# Altium PCB Motherboard.PcbDoc
Units mm, origin at the board's own origin, x right, y up, seen from the top; angles counter-clockwise.
Board outline 97.28 x 66.17 mm, 2 copper layers (Top Layer, Bottom Layer); 93 components, 50 nets, 275 pads, 91 vias.
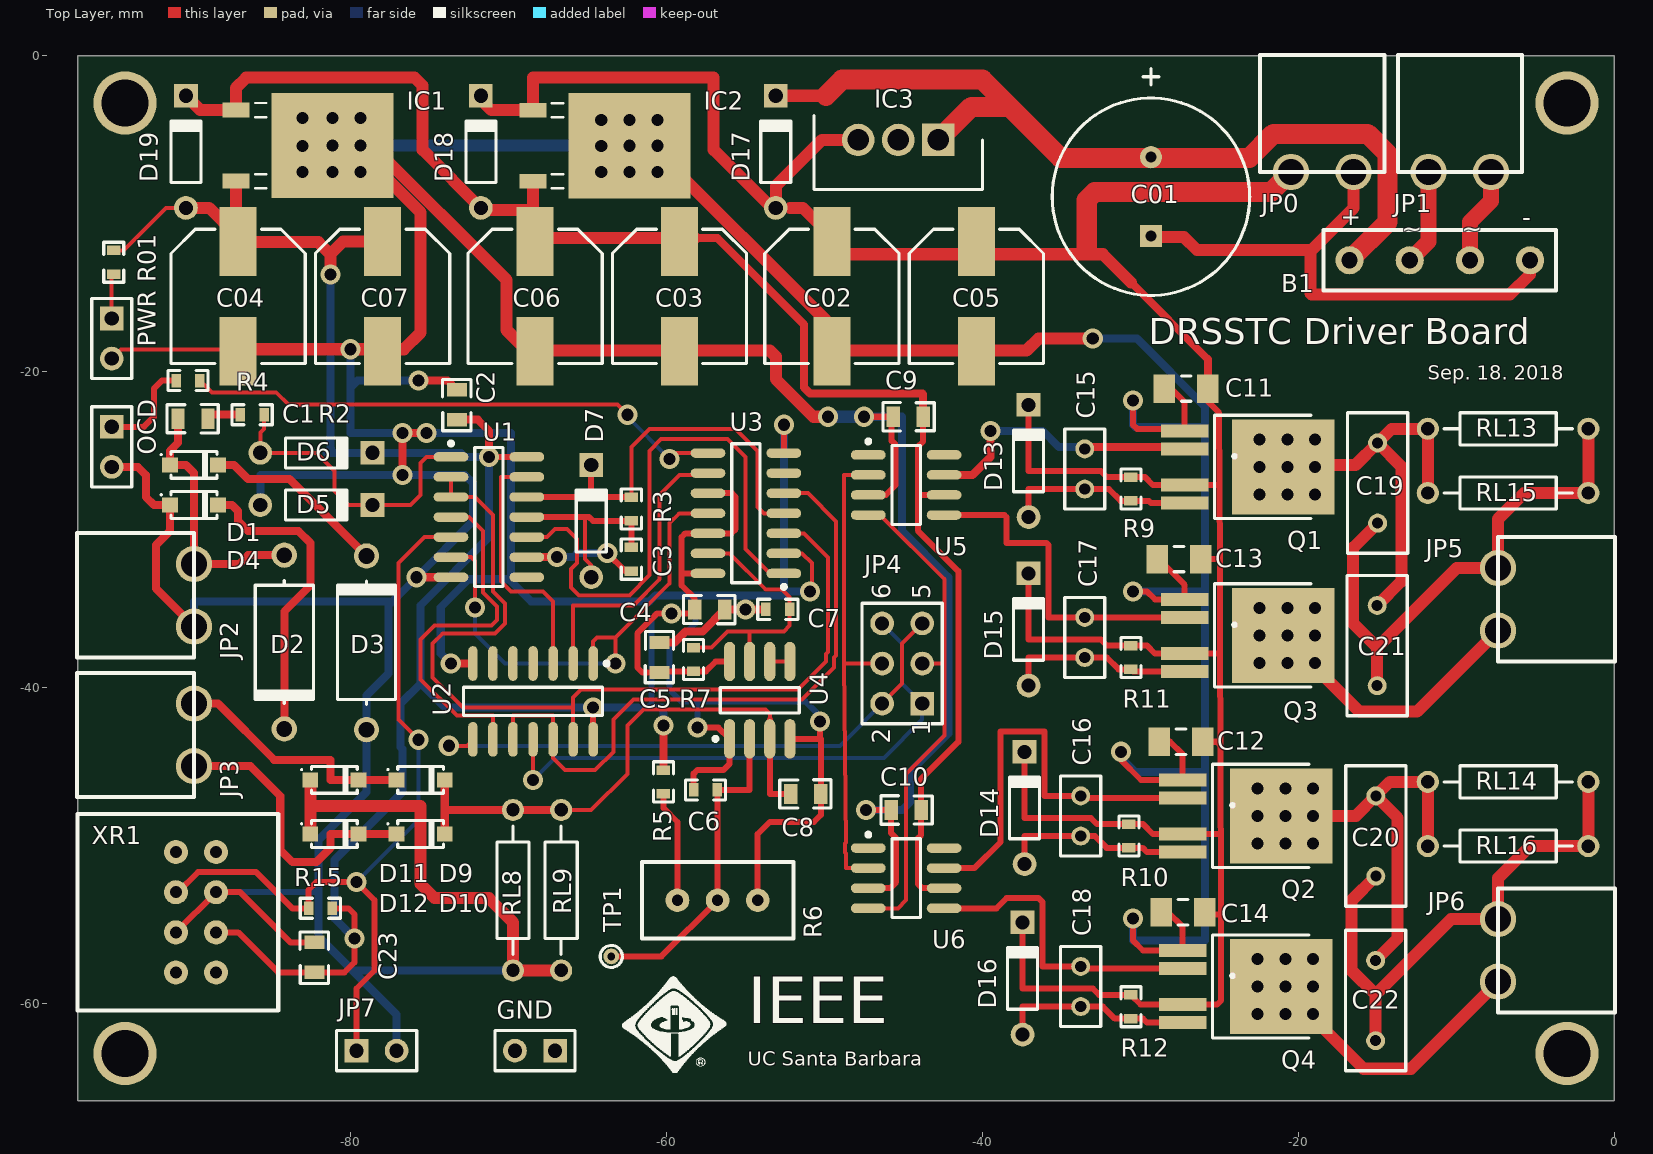
[diagram p0: Top Layer view]
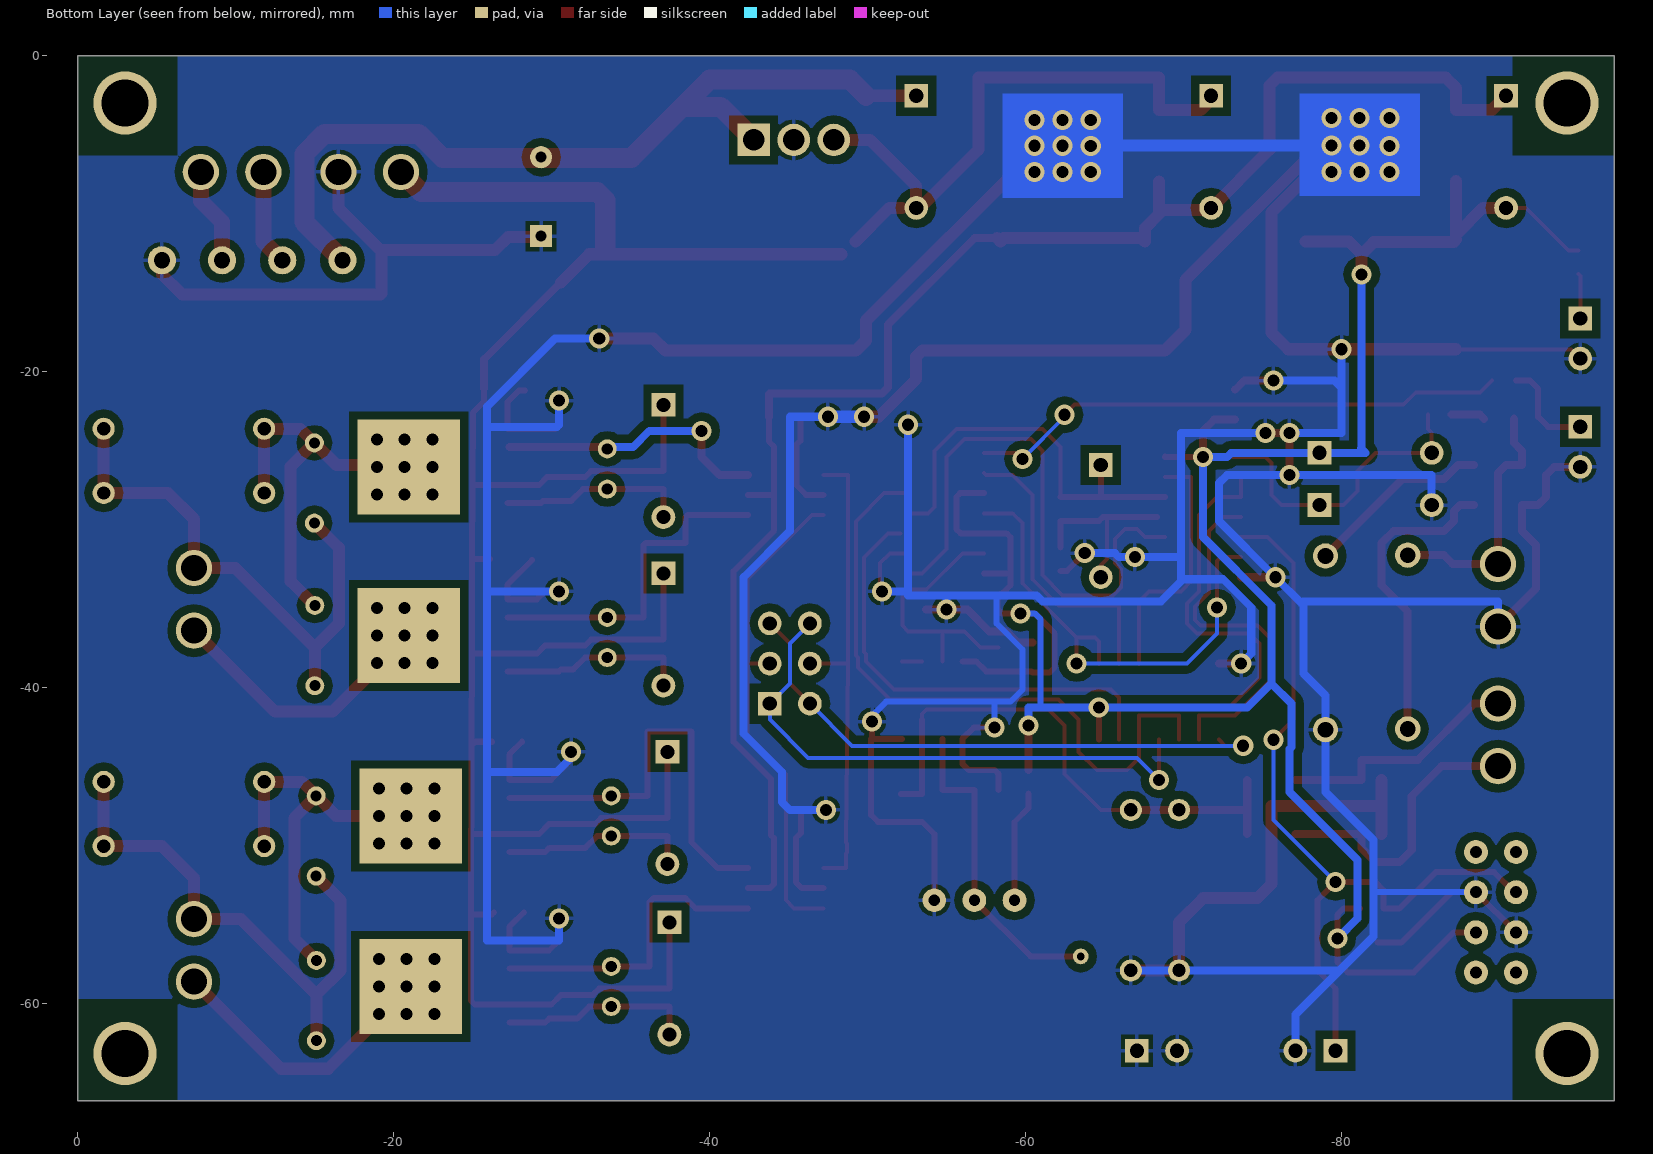
[diagram p1: Bottom Layer view, seen from below]

## Layer stack, top to bottom
Top Solder: solder mask 0.0102, Solder Resist, Dk 3.5
Top Layer: signal copper 0.0356
Dielectric 1: dielectric 0.32, FR-4, Dk 4.8
Bottom Layer: signal copper 0.0356
Bottom Solder: solder mask 0.0102, Solder Resist, Dk 3.5

## Board outline
-97.282,-66.167 -97.282,0 0,0 0,-66.167

## Design rules (kind name [scope] priority, off if disabled: settings)
Clearance "Bottom Plane" [(OnLayer('Bottom Layer') AND InNamedPolygon('Ground_Plane'))] p1: gap=0.508 ignorepadtopadclearanceinfootprint=FALSE except(0: Arc-Hole Track-Hole SMDPad-Hole THPad-Hole Via-Hole Fill-Hole Poly-Hole Region-Hole Text-Hole)
Clearance [All] p2: gap=0.254 ignorepadtopadclearanceinfootprint=FALSE except(0: Arc-Hole Track-Hole SMDPad-Hole THPad-Hole Via-Hole Fill-Hole Poly-Hole Region-Hole Text-Hole)
HoleSize [All] p1: absolutevalues=TRUE maxlimit=2.54 minlimit=0.4 maxpercent=80.000 minpercent=20.000
PolygonConnect [All] p1: connectstyle=Relief reliefconductorwidth=0.254 reliefentries=4 polygonreliefangle="90 Angle" airgapwidth=0.254
RoutingVias [All] p1: holewidth=0.711 width=1.27 viastyle="Through Hole" minholewidth=0.711 minwidth=1.27 maxholewidth=0.711 maxwidth=1.27
SolderMaskExpansion [All] p1: expansion=0.102
Width [All] p1: maxlimit=1.27 minlimit=0.254 preferedwidth=0.508
29 further rules are at their usual default settings.

## Classes and differential pairs
polygon class Planes: Ground_Plane
polygon class PlaneClass: Ground_Plane

## Components (designator, comment, footprint, x,y, rotation, side; value= is the part's Value field where it differs from the comment)
B1 "" KBP307 -11.049,-12.954 r0 top
C01 "12.5 x 25mm" CAP_12_5X25 -29.337,-6.43 r270 top value="1000uF 35V"
C1 "" D0805 -89.977,-22.987 r180 top value=0.1uF
C02 "330uF" CAPALUM8X10 -49.53,-15.24 r270 top
C2 "0805" D0805 -73.279,-22.098 r270 top value=0.1uf
C03 "" CAPALUM8X10 -59.182,-15.24 r270 top value=330uF
C3 "0603" D0603 -62.23,-31.877 r90 top value=22nF
C04 "" CAPALUM8X10 -87.122,-15.24 r270 top value=330uF
C4 "0805" D0805 -57.277,-35.067 r180 top value=0.1uf
C05 "8.3 x 10.2mm" CAPALUM8X10 -40.386,-15.24 r270 top value="330uF 25V"
C5 "0805" D0805 -60.452,-38.1 r90 top value=0.1uf
C06 "8.3x10.2mm" CAPALUM8X10 -68.326,-15.24 r270 top value="330uF 25V"
C6 "0603" D0603 -57.531,-46.482 r180 top value=0.1uf
C07 "8.3x10.2mm" CAPALUM8X10 -77.978,-15.24 r270 top value="330uF 25V"
C7 "0603" D0603 -52.959,-35.052 r0 top value=100pF
C8 "0805" D0805 -51.181,-46.736 r180 top value=100pF
C9 "0805" D0805 -44.704,-22.86 r0 top value=0.1uF
C10 "0805" D0805 -44.831,-47.752 r0 top value=0.1uF
C11 "0805" CAPC1206 -27.112,-21.082 r0 top value=10u
C12 "0805" CAPC1206 -27.432,-43.434 r0 top value=10u
C13 "0805" CAPC1206 -27.559,-31.877 r180 top value=10u
C14 "0805" CAPC1206 -27.305,-54.229 r180 top value=10u
C15 "Rad" RAD-0.1 -33.528,-26.166 r90 top value=.1u
C16 "Rad" RAD-0.1 -33.782,-48.133 r90 top value=.1u
C17 "Rad" RAD-0.1 -33.528,-36.834 r90 top value=.1u
C18 "Rad" RAD-0.1 -33.782,-58.928 r90 top value=.1u
C19 "Rad10" RAD-0.2 -14.986,-27.055 r90 top value=1u
C20 "Rad10" RAD-0.2 -15.1,-49.403 r90 top value=1u
C21 "Rad10" RAD-0.2 -15.013,-37.345 r90 top value=1u
C22 "Rad10" RAD-0.2 -15.113,-59.817 r90 top value=1u
C23 "0805" D0805 -82.296,-57.084 r270 top value=1u
D1 "1n5819" "SOD123 STD" -89.916,-25.908 r0 top
D2 "1N5337B" 1N533X -84.201,-31.623 r270 top
D3 "1N5337B" 1N533X -78.994,-42.672 r90 top
D4 "1n5819" "SOD123 STD" -89.916,-28.448 r0 top
D5 "1N4148" DO-35 -82.169,-28.448 r0 top
D6 "1N4148" DO-35 -82.169,-25.146 r0 top
D7 "1N4148" DO-35 -64.77,-29.464 r90 top
D9 "1n5819" "SOD123 STD" -75.565,-45.847 r0 top
D10 "1n5819" "SOD123 STD" -75.565,-49.276 r0 top
D11 "1n5819" "SOD123 STD" -81.026,-45.847 r0 top
D12 "1n5819" "SOD123 STD" -81.026,-49.276 r0 top
D13 "1N4148" DO-35 -37.084,-25.658 r90 top
D14 "1N4148" DO-35 -37.338,-47.625 r90 top
D15 "1N4148" DO-35 -37.084,-36.326 r90 top
D16 "1N4148" DO-35 -37.465,-58.42 r90 top
D17 "1N4148" DO-35 -53.086,-6.09 r90 top
D18 "1N4148" DO-35 -71.755,-6.09 r90 top
D19 "1N4148" DO-35 -90.424,-6.09 r90 top
GND "Interrupter" HDR1X2 -67.056,-62.992 r180 top
IC1 "7805T" DPAK -81.153,-5.695 r270 top
IC2 "7809T" DPAK -62.357,-5.705 r270 top
IC3 "7824T" TO254P470X1016X2040-3P -42.799,-5.334 r180 top
JP0 "20V AC" VH-2P-3.96 -18.49,-7.366 r180 top
JP1 "20V AC" VH-2P-3.96 -9.779,-7.366 r180 top
JP2 "Feedback" VH-2P-3.96 -89.916,-34.163 r270 top
JP3 "OCD CT" VH-2P-3.96 -89.916,-43.001 r270 top
JP4 "Header 3X2" HDR2X3 -43.815,-41.021 r90 top
JP5 "GDT1" VH-2P-3.96 -7.366,-34.417 r90 top
JP6 "GDT1" VH-2P-3.96 -7.366,-56.642 r90 top
JP7 "Interrupter" HDR1X2 -79.629,-62.992 r0 top
OCD "DIP" HDR1X2 -95.123,-23.495 r270 top
PWR "DIP" HDR1X2 -95.123,-16.637 r270 top
Q1 "FDD8424H_F085A" DUAL_DPAK_4L1 -19.205,-26.039 r270 top
Q2 "FDD8424H_F085A" DUAL_DPAK_4L1 -19.332,-48.133 r270 top
Q3 "FDD8424H_F085A" DUAL_DPAK_4L1 -19.205,-36.707 r270 top
Q4 "FDD8424H_F085A" DUAL_DPAK_4L1 -19.332,-58.928 r270 top
R01 "0603" D0603 -94.996,-13.081 r90 top value=1K
R2 "0603" D0603 -86.233,-22.733 r0 top value=1K
R3 "0603" D0603 -62.23,-28.702 r270 top value=20K
R4 "0603" D0603 -90.297,-20.574 r0 top value=1K
R5 "0603" D0603 -60.198,-45.974 r90 top value=1K
R6 "RPot" 3296W -56.769,-53.467 r180 top value=10k
R7 "0603" D0603 -58.293,-38.227 r90 top value=1K
R9 "0603" D0603 -30.607,-27.436 r90 top value=1K
R10 "0603" D0603 -30.734,-49.403 r90 top value=1K
R11 "0603" D0603 -30.607,-38.104 r90 top value=1K
R12 "0603" D0603 -30.607,-60.21 r90 top value=1K
R15 "0603" D0603 -81.915,-53.975 r0 top value=1K
RL8 "2512" AXIAL-0.4 -69.723,-52.832 r90 top value=20R
RL9 "2512" AXIAL-0.4 -66.675,-52.832 r90 top value=20R
RL13 "2512" AXIAL-0.4 -6.727,-23.622 r180 top value=20R
RL14 "2512" AXIAL-0.4 -6.731,-45.974 r180 top value=1K
RL15 "2512" AXIAL-0.4 -6.731,-27.686 r180 top value=20R
RL16 "2512" AXIAL-0.4 -6.731,-50.038 r180 top value=20R
TP1 "TP" TP0_8 -63.5,-57.023 r0 top
U1 "SN74HC14D" D014_N -71.247,-29.21 r0 top
U2 "SN74HC08D" D014_N -68.453,-40.881 r270 top
U3 "SN74HC74D" D014_N -54.978,-28.971 r180 top
U4 "LM311D" D008_M -54.102,-40.804 r90 top
U5 "TC4423AVOA" SOIC-OA8_N -44.831,-27.178 r0 top
U6 "TC4423AVOA" SOIC-OA8_N -44.831,-52.07 r0 top
XR1 "2412 Optic Receiver" OPF2412T -95.504,-74.803 r180 top

## Footprints (in the part's own frame and the unit in brackets; to place one, negate y for a bottom-side part, rotate by r counter-clockwise, add the part's x,y. Pads: shape width x height; smd on the part's side, far side on the other; paste and mask are expansions set on the pad)
1N533X [mm]
  round 1.6 hole 1: A(0,0) K(11,0)
  silkscreen extent 1.6,-1.84 9.4,1.84
3296W [mm] "3296W Trimpot"
  round 1.5 hole 0.7: 1(-2.54,0) 2(0,0) 3(2.54,0)
  silkscreen extent -4.8,-2.41 4.8,2.42, body extent -4.7,-2.29 4.7,2.29, height 10.03
AXIAL-0.4 [mm] "Axial Device, Thru-Hole; 2 Leads; 0.4 in Pin Spacing"
  round 1.4 hole 0.85: 1(-5.08,0) 2(5.08,0)
  silkscreen extent -4.06,-1.02 4.06,1.02
CAP_12_5X25 [mm]
  round 1.4 hole 0.7: 1(0,0)
  rect 1.4x1.4 hole 0.7: 2(5,0)
  silkscreen extent -5.6,-6.25 8.75,6.25
CAPALUM8X10 [mm] "Aluminum Electrolytic Capacitor, Body 8.30x8.30x10.30mm, IPC Low Density"
  rect 4.35x2.35 smd: 1(-3.475,0) 2(3.475,0)
  silkscreen extent -4.25,-4.25 4.25,4.25, body extent -4.45,-4.25 4.45,4.25, height 10.3
CAPC1206 [mm] "Chip Capacitor, 2-Leads, Body 3.20x1.60mm, IPC Medium Density"
  rect 1.35x1.8 smd: 1(-1.375,0) 2(1.375,0)
  silkscreen extent -0.3,-0.8 0.3,0.8, body extent -1.7,-0.9 1.7,0.9, height 1.8
D008_M [mm] "SOIC, 8-Leads, Body 4.9x3.9mm, Pitch 1.27mm, IPC Low Density"
  oval 2.5x0.7 smd: 1(-2.45,1.905) 2(-2.45,0.635) 3(-2.45,-0.635) 4(-2.45,-1.905) 5(2.45,-1.905) 6(2.45,-0.635) 7(2.45,0.635) 8(2.45,1.905)
  silkscreen extent -2.57,-2.5 0.8,2.93, body extent -2,-2.5 2,2.5, height 1.75
D014_N [mm] "SOIC, 14-Leads, Body 8.7x3.9mm, Pitch 1.27mm, IPC Medium Density"
  oval 2.2x0.6 smd: 1(-2.4,3.81) 2(-2.4,2.54) 3(-2.4,1.27) 4(-2.4,0) 5(-2.4,-1.27) 6(-2.4,-2.54) 7(-2.4,-3.81) 8(2.4,-3.81) 9(2.4,-2.54) 10(2.4,-1.27) 11(2.4,0) 12(2.4,1.27) 13(2.4,2.54) 14(2.4,3.81)
  silkscreen extent -2.52,-4.4 0.9,4.78, body extent -1.95,-4.33 1.95,4.33, height 1.75
D0603 [mm] "D0603"
  rect 0.6x0.85 smd: 1(-0.75,0) 2(0.75,0)
  silkscreen extent -1.27,-0.64 1.27,0.64, body extent -0.8,-0.4 0.8,0.4, height 0.5
D0805 [mm] "D0805"
  rect 0.85x1.27 smd: 1(-0.95,0) 2(0.95,0)
  silkscreen extent -1.6,-0.9 1.65,0.9, body extent -1,-0.64 1,0.64, height 1.25
DO-35 [mm] "Diode, Axial; Body 3.8 x 1.9 mm (LxDia. max), Lead Dia. 0.53 mm (max)"
  round 1.5 hole 0.9: 1(-3.55,0)
  rect 1.5x1.5 hole 0.9: 2(3.55,0)
  silkscreen extent -1.95,-0.95 2.05,0.95
DPAK [mil]
  rect 37x67 smd paste+0 mask+0: 1(-88.58,-240.5) 3(88.58,-240.5)
  rect 262x304 smd paste+0 mask+0: 2(0,0)
  silkscreen extent -106,-193 106,-165, body extent 0,0 10,10, height 10
DUAL_DPAK_4L1 [mm]
  rect 0.8x3 smd: 1(-2.28,-8) 2(-1.14,-8) 4(1.14,-8) 5(2.28,-8)
  rect 6x6.5 smd: 6(0,-1.75)
  rect 6x6.5 smd far side: 6(0,-1.75)
  silkscreen extent -3.27,-6.1 3.27,0
HDR1X2 [mm] "Connector; Header; 2 Position"
  rect 1.5x1.5 hole 0.9: 1(0,0)
  round 1.5 hole 0.9: 2(2.54,0)
  silkscreen extent -1.27,-1.27 3.81,1.27
HDR2X3 [mm] "Connector; Header; 3x2 Position"
  rect 1.5x1.5 hole 0.9: 1(0,0)
  round 1.5 hole 0.9: 2(0,2.54) 3(2.54,0) 4(2.54,2.54) 5(5.08,0) 6(5.08,2.54)
  silkscreen extent -1.27,-1.27 6.35,3.81
KBP307 [mil] "KBP307 Bridge, compatible with standard library"
  round 70 hole 40: 1(-225,0) 2(-75,0) 3(225,0) 4(75,0)
  silkscreen extent -290,-75 290,75
OPF2412T [mil] "Optic Receiver"
  round 60 hole 30: 1(-275,-660) 2(-275,-760) 3(-275,-860) 4(-275,-960) 5(-175,-960) 6(-175,-860) 7(-175,-760) 8(-175,-660)
  silkscreen extent -430,-1055 70,-565
RAD-0.1 [mm] "Radial Cap, Thru-Hole; 2 Leads; 0.1 in Pin Spacing"
  round 1.2 hole 0.7: 1(-1.27,0) 2(1.27,0)
  silkscreen extent -2.54,-1.27 2.54,1.27
RAD-0.2 [mm] "Radial Cap, Thru-Hole; 2 Leads; 0.2 in Pin Spacing"
  round 1.2 hole 0.7: 1(-2.54,0) 2(2.54,0)
  silkscreen extent -4.44,-1.91 4.44,1.91
"SOD123 STD" [mm] "SODFL, 2-Leads, Body 1.55x3.70mm, IPC Medium Density"
  rect 1x0.95 smd: A(-1.524,0) C(1.524,0)
  silkscreen extent -2.12,-0.85 1.45,0.85, body extent -1.43,-0.85 1.42,0.85, height 1.35
SOIC-OA8_N [mm] "SOIC, 8-Leads, Body 4.9x3.9mm, Pitch 1.27mm, IPC Medium Density"
  oval 2.2x0.6 smd: 1(-2.4,1.905) 2(-2.4,0.635) 3(-2.4,-0.635) 4(-2.4,-1.905) 5(2.4,-1.905) 6(2.4,-0.635) 7(2.4,0.635) 8(2.4,1.905)
  silkscreen extent -2.52,-2.5 0.9,2.88, body extent -2,-2.5 2,2.5, height 1.75
TO254P470X1016X2040-3P [mm]
  rect 2.055x2.055 / inner round 2.055 / far side rect 2.055x2.055 hole 1.37: 1(0,0)
  round 2.055 hole 1.37: 2(2.535,0) 3(5.07,0)
  silkscreen extent -2.8,-1.55 7.87,3.15
TP0_8 [mm] "Test Point"
  round 1 hole 0.5 mask+0.05: 1(0,0)
  silkscreen extent -0.7,-0.7 0.7,0.7
VH-2P-3.96 [mm]
  round 2.3 hole 1.65: 1(-1.98,0) 2(1.98,0)
  silkscreen extent -3.93,-7.4 3.93,0

## Part data
B1: library part Bridge1, "Full Wave Diode Bridge", DatasheetVersion=E2732B, LatestRevisionDate=29-May-2009, LatestRevisionNote="Sch pins A & K swapped.", PackageDescription="Bridge Rectifier; 4 Terminals; Body 9.4 x 9.4 mm (typ); Pitch 5.08 mm", PackageReference=D-38, Published=8-Jun-2000, Publisher="Altium Limited"
C01 C02 C03 C04 C05 C06 C07: library part "Cap Pol1", "Polarized Capacitor (Radial)", LatestRevisionDate=17-Jul-2002, LatestRevisionNote="Re-released for DXP Platform.", PackageDescription="Polarized Capacitor (Radial); 2 Leads", PackageReference=RB7.6-15, Published=8-Jun-2000, Publisher="Altium Limited"
C1 C2 C3 C4 C5 C6 C7 C8 C9 C10 C11 C12 C13 C14 C15 C16 C17 C18 C19 C20 C21 C22 C23: library part Cap, "Capacitor", LatestRevisionDate=17-Jul-2002, LatestRevisionNote="Re-released for DXP Platform.", PackageDescription="Radial Cap, Thru-Hole; 2 Leads; 0.3 in Pin Spacing", Published=8-Jun-2000, Publisher="Altium Limited"
  C1: PackageReference="0805 NP0"
  C2 C3 C4 C5 C6 C7 C8 C9 C10 C11 C12 C13 C14 C15 C16 C17 C18 C19 C20 C21 C22 C23: PackageReference=RAD-0.3
D1 D4 D9 D10 D11 D12: library part Component_1, "1N5819 Diode"
D2 D3: library part "D Zener", "Zener Diode", LatestRevisionDate=17-Jul-2002, LatestRevisionNote="Re-released for DXP Platform.", PackageDescription="Diode, Thru-Hole; 2 Leads; 0.7 in Pin Spacing", PackageReference=DIODE-0.7, Published=8-Jun-2000, Publisher="Altium Limited"
D5 D6 D7: library part Diode, "Default Diode", Code_JEDEC=DO-214-AB, LatestRevisionDate=17-Jul-2002, LatestRevisionNote="Re-released for DXP Platform.", PackageDescription="DO-214-AB/SMC; 2 C-Bend Leads; Body 7.9 x 5.9 mm, inc. leads (LxW)", PackageReference=SMC, PackageVersion=Sep-1996, Published=8-Jun-2000, Publisher="Altium Limited"
D13 D14 D15 D16 D17 D18 D19: "High Conductance Fast Diode", Code_JEDEC=DO-204-AH, ComponentLink1Description="Manufacturer Link", ComponentLink1URL=http://www.fairchildsemi.com/, ComponentLink2Description=Datasheet, ComponentLink2URL=http://www.fairchildsemi.com/ds/1N%2F1N4148.pdf, DatasheetDocument=1997, LatestRevisionDate=17-Jul-2002, LatestRevisionNote="Re-released for DXP Platform.", PackageReference=DO-35, Published=8-Jun-2000, Publisher="Altium Limited"
GND JP0 JP1 JP2 JP3 JP5 JP6 JP7: library part "Header 2", "Header, 2-Pin", LatestRevisionDate=17-Jul-2002, LatestRevisionNote="Re-released for DXP Platform.", Publisher="Altium Limited"
IC1 IC2 IC3: library part "Volt Reg", "Voltage Regulator", LatestRevisionDate=29-May-2009, LatestRevisionNote="IPC-7351 Footprint Added.", PackageDescription="3-Pin Transistor Outline Package 2.54 mm Pitch, 15.1 mm Lead Span", PackageReference=D2PAK, Published=24-Mar-1999, Publisher="Altium Limited"
JP4: "Header, 3-Pin, Dual row", LatestRevisionDate=17-Jul-2002, LatestRevisionNote="Re-released for DXP Platform.", Publisher="Altium Limited"
OCD PWR: library part LED3, "Typical BLUE SiC LED", DatasheetVersion=16-Apr-2002, LatestRevisionDate=17-Dec-2003, LatestRevisionNote="PCB Footprint replaced.", PackageDescription="SM LED; 2 C-Bend Leads; Body 3.5 x 2.8 x 1.9 mm, inc leads (LxWxH typ)", PackageReference=3.5X2.8X1.9, PackageVersion=16-Apr-2002, Published=8-Jun-2000, Publisher="Altium Limited"
Q1 Q2 Q3 Q4: "MOSFET Dual N&PCH PwrTrench +/- 40V,20A", Manufacturer_Name="Fairchild Semiconductor", RS Part Number=8648102P, Datasheet Link=http://www.mouser.com/ds/2/308/FDD8424H_F085A-1122839.pdf, Manufacturer_Part_Number=FDD8424H_F085A, RS Price/Stock=http://uk.rs-online.com/web/p/products/8648102P
R01 R2 R3 R4 R5 R7 R9 R10 R11 R12 R15 RL8 RL9 RL13 RL14 RL15 RL16: library part Res1, "Resistor", LatestRevisionDate=17-Jul-2002, LatestRevisionNote="Re-released for DXP Platform.", PackageDescription="Axial Device, Thru-Hole; 2 Leads; 0.3 in Pin Spacing", PackageReference=AXIAL-0.3, Published=8-Jun-2000, Publisher="Altium Limited"
R6: "Trimpot"
U1: "Hex Schmitt-Trigger Inverter", Code_IPC=SOIC127P600-14, ComponentLink1Description="Manufacturer Link", ComponentLink1URL=http://www.ti.com/, ComponentLink2Description=Datasheet, ComponentLink2URL=http://www-s.ti.com/sc/ds/sn74hc14.pdf, DatasheetVersion=May-1997, LatestRevisionDate=13-Apr-2006, LatestRevisionNote="IPC-7351 Footprint Added.", PackageDescription="14-Pin Small Outline Integrated Circuit 1.27 mm Pitch", PackageReference=D014, PackageVersion=Jan-1998, Published=8-Jun-2000, Publisher="Altium Limited"
U2: "Quadruple 2-Input Positive-AND Gate", Code_IPC=SOIC127P600-14, ComponentLink1Description="Manufacturer Link", ComponentLink1URL=http://www.ti.com/, ComponentLink2Description=Datasheet, ComponentLink2URL=http://www-s.ti.com/sc/ds/SN74HC08.pdf, DatasheetVersion=May-1997, LatestRevisionDate=13-Apr-2006, LatestRevisionNote="IPC-7351 Footprint Added.", PackageDescription="14-Pin Small Outline Integrated Circuit 1.27 mm Pitch", PackageReference=D014, PackageVersion=Jan-1998, Published=8-Jun-2000, Publisher="Altium Limited"
U3: "Dual D-Type Positive-Edge-Triggered Flip-Flop with Clear and Preset", Code_IPC=SOIC127P600-14, ComponentLink1Description="Manufacturer Link", ComponentLink1URL=http://www.ti.com/, ComponentLink2Description=Datasheet, ComponentLink2URL=http://www-s.ti.com/sc/ds/sn74hc74.pdf, DatasheetVersion=May-1997, LatestRevisionDate=13-Apr-2006, LatestRevisionNote="IPC-7351 Footprint Added.", PackageDescription="14-Pin Small Outline Integrated Circuit 1.27 mm Pitch", PackageReference=D014, PackageVersion=Jan-1998, Published=8-Jun-2000, Publisher="Altium Limited"
U4: library part LM111JG, "Differential Comparator with Strobe", ComponentLink1Description="Manufacturer Link", ComponentLink1URL=http://www.ti.com/, ComponentLink2Description=Datasheet, ComponentLink2URL=http://www-s.ti.com/sc/ds/lm111.pdf, DatasheetVersion=Feb-1992, LatestRevisionDate=04-Mar-2005, LatestRevisionNote="Stylized 3D Model Added.", PackageDescription="DIP; 8 Leads; Row Spacing 7.62 mm; Pitch 2.54 mm", PackageReference=JG008, PackageVersion=Jan-1995, Published=16-Jan-2001, Publisher="Altium Limited"
U5 U6: "3A Dual High-Speed Power MOSFET Drivers, Inverting, Extended Temperature", Supplier Part Number 1=TC4423AVOA-ND, Code_IPC=SOIC127P600-8, ComponentLink1Description=Datasheet, ComponentLink1URL=http://ww1.microchip.com/downloads/en/DeviceDoc/21998b.pdf, ComponentLink2Description="Packaging Specification", ComponentLink2URL=http://www.microchip.com/stellent/groups/techpub_sg/documents/packagingspec/en012702.pdf, ComponentLink3Description="Microchip.com Home", ComponentLink3URL=http://www.microchip.com/, DatasheetVersion="revB, Apr-2007", LatestRevisionDate=01-Mar-2010, LatestRevisionNote="Sch Layout changed.", PackageDescription="8-Lead Plastic Small Outline (OA) - Narrow, 3.90mm Body [SOIC]", PackageReference=SOIC-OA8, PackageVersion="revBB, Aug-2009", Published=29-Jan-2009, Publisher="Altium Limited", Supplier 1=Digi-Key
XR1: library part OPF2412T, "Optic Receiver"

## Free pads (board coordinates)
  round 4 hole 3: 0(-94.282,-63.167) 0(-94.282,-3) 0(-3,-63.167) 0(-3,-3)

## Via types
v1: diameter 1.27, hole 0.762, Top Layer to Bottom Layer, 91 vias

## Nets (pads, with @x,y where several pads share a name; then routed paths per layer and width w, separated by ;. In a path a pad name is that pad's centre, name@x,y a point inside that pad or via, vN(x,y) a via of type N, cw(c..) or ccw(c..) an arc to the next point about the centre after c; other vN are vias at no path point)
5V: C2.2 C04.1 C4.2 C5.1 C07.1 C23.2 D6.2 D19.1 IC1.3 R01.2 R5.2 R7.1 R15.2 U1.14 U2.14 U3.10 U3.12 U3.14 U4.8 XR1.2 | length 159
  Top Layer w0.254: R01.2 -94.373,-12.331 -91.694,-9.652 D19.1@-90.069,-9.652
  Top Layer w0.381: XR1.2 -87.122,-55.499 -84.587,-58.034 C23.2 -80.386,-58.034 -79.756,-57.404 v1(-79.756,-55.88) -79.756,-54.356 -80.137,-53.975 R15.2 ; v1(-71.247,-25.4) U1.14 U1.14@-68.834,-25.387 ; U2.14@-64.643,-43.307 U2.14 v1(-64.643,-41.275) ; U3.14 -59.04,-32.781 -59.055,-32.766 ; U3.10 -55.865,-27.701 -55.626,-27.94 -55.626,-29.972 -55.895,-30.241 U3.12 -58.816,-30.241 -59.055,-30.48 -59.055,-32.766 ; U4.8 -56.896,-38.354 -57.519,-38.977 R7.1 -60.379,-38.977 C5.1 -61.534,-39.05 -61.849,-38.735 -61.849,-36.576 -60.579,-35.306 v1(-59.69,-35.306) -58.496,-35.306 -58.242,-35.052 C4.2 -58.227,-34.356 -59.055,-33.528 -59.055,-32.766
  Top Layer w0.508: C04.1@-87.262,-11.625 C04.1@-87.262,-11.335 ; C2.2 -71.948,-23.048 -71.247,-23.749 v1(-71.247,-25.4) ; R5.2 v1(-60.198,-42.418)
  Top Layer w0.762: D19.1 -88.957,-9.64 -87.262,-11.335 IC1.3 ; C04.1@-87.262,-11.625 C04.1 ; C04.1@-87.122,-11.811 -82.042,-11.811 -81.28,-12.573 ; v1(-81.28,-13.843) -81.28,-12.573 ; C07.1@-77.724,-11.781 -80.488,-11.781 -81.28,-12.573
  Bottom Layer w0.381: -60.833,-41.275 -60.96,-41.148 -60.96,-35.687 -60.579,-35.306 v1(-59.69,-35.306)
  Bottom Layer w0.508: v1(-81.28,-13.843) -81.28,-24.832 -81.25,-24.862 -81.534,-25.146 D6.2 -73.025,-25.146 -72.771,-25.4 v1(-71.247,-25.4) -71.247,-30.48 -75.565,-34.798 -75.565,-39.751 ; v1(-79.756,-55.88) -81.026,-54.61 -81.026,-50.927 -76.708,-46.609 -76.708,-43.907 -76.835,-43.78 -76.835,-41.021 -75.565,-39.751 ; v1(-60.198,-42.418) -60.198,-41.275 -60.833,-41.275 v1(-64.643,-41.275) -74.041,-41.275 -75.565,-39.751
9V: C03.1 C06.1 C9.2 C10.2 D18.1 D19.2 IC1.1 IC2.3 U5.6 U6.6 | length 101
  Top Layer w0.381: C9.2 -43.754,-24.426 -44.096,-24.768 -44.096,-27.813 ; U6.6 -43.815,-52.705 -44.069,-52.451 -44.069,-49.53 -43.881,-49.342 C10.2 -43.881,-45.786 -41.529,-43.434 -41.529,-32.639 -44.096,-30.072 -44.096,-27.813 ; U5.6 -44.096,-27.813
  Top Layer w0.508: C03.1@-58.212,-11.557 -56.769,-11.557 -51.308,-17.018 -51.308,-21.005 -50.915,-21.398 -43.797,-21.398 -43.754,-21.441 C9.2
  Top Layer w0.762: D19.2 -89.519,-3.445 IC1.1 -87.262,-2.045 -86.614,-1.397 -75.946,-1.397 -75.438,-1.905 -75.438,-5.969 -71.628,-9.779 -68.469,-9.779 -68.469,-7.958 IC2.3 ; C06.1@-68.469,-10.017 -67.564,-10.922 -67.564,-11.765 -67.356,-11.557 -58.628,-11.557 -58.42,-11.765 C03.1@-58.212,-11.557
24V: C02.1 C05.1 C11.2 C12.2 C13.1 C14.1 D13.2 D14.2 D15.2 D16.2 D17.1 D18.2 IC2.1 IC3.3 JP0.2 Q1.4 Q2.4 Q3.4 Q4.4 R9.2 R10.2 R11.2 R12.2 | length 193.8
  Top Layer w0.381: D16.2 -37.465,-59.055 -33.02,-59.055 -32.615,-59.46 R12.2 -29.999,-60.068 Q4.4 -25.143,-60.068 -24.892,-59.817 -24.892,-54.356 ; D14.2 -37.338,-48.26 -33.147,-48.26 -32.754,-48.653 R10.2 -29.833,-48.653 -29.213,-49.273 Q2.4 -27.329,-49.276 -25.019,-49.276 ; D15.2 -37.084,-36.961 -32.512,-36.961 -32.119,-37.354 R11.2 -29.579,-37.354 -29.087,-37.846 -24.956,-37.846 ; D13.2 -37.084,-26.293 -32.512,-26.293 -32.119,-26.686 R9.2 -29.706,-26.686 -29.213,-27.179 Q1.4 ; Q1.4@-27.205,-27.175 -25.019,-27.175 ; C14.1@-26.355,-54.229 -26.228,-54.356 -24.892,-54.356 ; C12.2@-26.228,-43.434 C12.2 -25.146,-43.434 -25.019,-43.561 ; C13.1@-26.101,-31.877 -25.019,-31.877 ; C11.2 -25.737,-21.888 -25.016,-22.609 -24.98,-31.874 -24.956,-37.846 ; -24.956,-37.846 -24.935,-43.431 -24.892,-54.356
  Top Layer w0.508: D17.1@-52.82,-9.64 -52.175,-9.64 ; C02.1@-49.254,-11.765 C02.1@-49.149,-11.765 ; -30.607,-14.351 -25.737,-19.221 C11.2
  Top Layer w0.762: D18.2@-71.628,-2.917 -71.09,-3.455 IC2.1 -68.466,-1.397 -57.023,-1.397 -57.023,-5.959 -53.342,-9.64 D17.1 -53.086,-8.255 -50.165,-5.334 IC3.3 ; -52.175,-9.64 -51.379,-9.64 C02.1@-49.254,-11.765 ; C02.1@-48.361,-12.553 -48.341,-12.573 -32.385,-12.573 -30.607,-14.351
  Top Layer w1.27: -33.401,-12.319 -33.401,-9.144 -32.893,-8.636 -21.74,-8.636 JP0.2
GND: B1.3 C01.2 C2.1 C02.2 C3.1 C03.2 C4.1 C04.2 C5.2 C05.2 C06.2 C6.2 C7.1 C07.2 C8.1 C9.1 C10.1 C11.1 C12.1 C13.2 C14.2 C23.1 D3.A D4.A D5.1 D11.A D12.A GND.1 GND.2 IC1.2 IC2.2 IC3.2 JP0.1 JP2.2 JP7.2 OCD.2 PWR.2 Q1.1 Q2.1 Q3.1 Q4.1 R6.1 RL8.1 RL9.1 U1.7 U1.9 U2.7 U3.2 U3.7 U4.1 U4.4 U5.3 U6.3 XR1.3 XR1.7 | length 602.3
  Top Layer w0.254: PWR.2 -94.534,-18.588 C04.2@-87.249,-18.588 ; U3.2 -51.42,-31.511 -50.8,-32.131 -50.8,-33.782 v1(-50.927,-33.909)
  Top Layer w0.381: XR1.7 XR1.3 -86.995,-52.959 -83.82,-56.134 C23.1 ; v1(-63.754,-31.496) -62.623,-32.627 C3.1 ; C6.2 -58.281,-45.454 -58.039,-45.212 -56.388,-45.212 -56.007,-44.831 U4.1 -56.716,-42.545 v1(-58.039,-42.545) ; R6.1 -54.229,-49.276 -53.467,-48.514 -50.673,-48.514 -50.231,-48.072 C8.1 -50.231,-43.254 ; U3.7 v1(-52.578,-23.368) ; U4.4 -50.231,-43.254 ; v1(-50.292,-42.164) -50.292,-43.193 -50.231,-43.254 ; v1(-47.498,-22.86) C9.1 -45.747,-22.953 -45.747,-24.387 -45.493,-24.641 -45.493,-27.181 -46.125,-27.813 U5.3 ; v1(-47.371,-47.752) C10.1 -45.781,-49.215 -45.466,-49.53 -45.466,-52.324 -45.847,-52.705 U6.3 ; v1(-31.242,-44.069) -31.242,-44.577 -29.966,-45.853 Q2.1 -27.332,-44.23 -28.128,-43.434 ; v1(-30.48,-54.61) -30.48,-56.007 -29.839,-56.648 Q4.1 -27.332,-55.152 C14.2@-28.255,-54.229 ; v1(-30.48,-33.909) -29.591,-33.909 -29.083,-34.417 -27.205,-34.417 -27.205,-33.501 C13.2@-28.765,-31.941 ; v1(-30.48,-21.844) -30.48,-23.368 -30.216,-23.632 Q1.1@-27.332,-23.632 ; C11.1@-28.321,-21.209 -27.935,-21.209 -27.205,-21.939 Q1.1@-27.205,-23.628
  Top Layer w0.508: OCD.2 -93.472,-26.035 -92.964,-26.543 -92.964,-27.94 -92.456,-28.448 D4.A -91.44,-30.099 -92.329,-30.988 -92.329,-33.73 JP2.2 ; v1(-76.708,-26.543) v1(-76.708,-23.876) v1(-75.184,-23.876) ; v1(-75.819,-33.02) U1.7 ; v1(-75.692,-20.574) -73.853,-20.574 C2.1 ; v1(-73.66,-38.481) U2.7 ; U1.9 v1(-66.929,-31.75) ; C5.2 -59.502,-37.15 -58.801,-36.449 -57.709,-36.449 C4.1 v1(-54.991,-35.067) -54.976,-35.052 C7.1
  Top Layer w0.762: C04.2@-87.249,-18.588 v1(-80.01,-18.588) -76.627,-18.588 -75.565,-17.526 -75.565,-9.93 -78.129,-7.366 v1(-79.375,-7.366) -79.482,-7.366 v1(-81.153,-5.695) v1(-79.375,-5.695) -78.633,-5.695 -70.136,-14.192 -70.136,-17.367 -68.834,-18.669 -53.467,-18.669 -53.086,-19.05 -53.086,-20.485 -50.711,-22.86 v1(-49.784,-22.86) ; D12.A -82.55,-47.498 ; D11.A -82.55,-47.498 ; RL9.1 RL8.1 -69.723,-54.864 -71.247,-53.34 -74.676,-53.34 -75.565,-52.451 -75.565,-47.498 -82.55,-47.498 ; v1(-62.357,-5.705) v1(-60.579,-5.705) -60.579,-6.096 -49.911,-16.764 -49.911,-18.034 -49.276,-18.669 -37.211,-18.669 -36.449,-17.907 v1(-33.02,-17.907) ; C01.2@-29.337,-11.477 -27.258,-11.477 -26.416,-12.319 -19.177,-12.319 -16.51,-9.652 JP0.1 ; -19.224,-12.366 -19.224,-15.066 -19.177,-15.113 -6.604,-15.113 -5.334,-13.843 B1.3
  Bottom Layer w0.381: XR1.3 -82.042,-52.959 ; -58.166,-34.163 -58.166,-35.941 -59.817,-37.592 -59.817,-40.132 -59.055,-40.894 -58.039,-40.894 ; v1(-58.039,-42.545) -58.039,-40.894 ; v1(-50.292,-42.164) -50.292,-41.783 -51.181,-40.894 -58.039,-40.894
  Bottom Layer w0.508: JP2.2 -89.916,-34.544 -77.597,-34.544 ; D5.1 -85.719,-26.543 v1(-76.708,-26.543) -72.771,-26.543 -72.263,-27.051 -72.263,-29.464 v1(-75.819,-33.02) -77.47,-34.671 -77.597,-34.544 ; v1(-80.01,-18.588) -80.01,-21.021 ; JP7.2 -77.089,-60.706 -79.883,-57.912 ; v1(-76.708,-23.876) -80.01,-23.876 -80.01,-21.021 ; v1(-75.692,-20.574) -79.563,-20.574 -80.01,-21.021 ; v1(-75.184,-23.876) -69.85,-23.876 -69.85,-31.75 ; v1(-73.66,-38.481) -74.295,-37.846 -74.295,-34.925 -72.517,-33.147 -69.977,-33.147 -69.85,-33.274 ; RL9.1 RL8.1 -79.883,-57.912 ; v1(-63.754,-31.496) -65.659,-31.496 -65.913,-31.75 v1(-66.929,-31.75) -69.85,-31.75 ; v1(-54.991,-35.067) -54.991,-34.163 ; v1(-52.578,-23.368) -52.578,-34.036 ; v1(-50.927,-33.909) -52.451,-33.909 -52.578,-34.036 ; v1(-47.498,-22.86) -45.085,-22.86 -45.085,-30.099 -42.164,-33.02 -42.164,-42.926 -44.577,-45.339 -44.577,-47.244 -45.085,-47.752 v1(-47.371,-47.752) ; v1(-33.02,-17.907) -30.226,-17.907 -25.908,-22.225 -25.908,-23.495 ; v1(-31.242,-44.069) -31.242,-44.45 -30.353,-45.339 -25.908,-45.339 ; v1(-30.48,-54.61) -30.48,-56.007 -25.908,-56.007 -25.908,-45.339 ; v1(-30.48,-33.909) -25.908,-33.909 ; v1(-30.48,-21.844) -30.48,-23.368 -30.353,-23.495 -25.908,-23.495 ; -79.883,-57.912 -82.042,-55.753 -82.042,-52.959 -82.042,-49.657 -78.994,-46.609 D3.A -78.994,-40.513 -77.597,-39.116 -77.597,-34.544 ; -69.85,-33.274 -68.58,-34.544 -61.087,-34.544 -60.706,-34.163 -58.166,-34.163 -54.991,-34.163 ; -69.85,-33.274 -69.85,-31.75 ; -54.991,-34.163 -52.578,-34.163 -52.578,-34.036 ; -25.908,-45.339 -25.908,-33.909 ; -25.908,-33.909 -25.908,-23.495
  Bottom Layer w0.762: v1(-81.153,-5.695) v1(-79.375,-5.695) -62.367,-5.695 v1(-62.357,-5.705) v1@-62.351,-5.711 ; v1(-49.784,-22.86) v1(-47.498,-22.86)
  other v1: -83.058,-7.366 -81.153,-7.366 -64.135,-7.366 -62.357,-7.366 -60.579,-7.366 -83.058,-5.715 -64.135,-5.715 -64.135,-4.064 -62.357,-4.064 -60.579,-4.064 -83.058,-3.937 -81.153,-3.937 -79.375,-3.937
NetB1_1: B1.1 C01.1 D17.2 IC3.1 | length 55.5
  Top Layer w0.762: D17.2 -49.909,-2.54
  Top Layer w1.27: -49.909,-2.54 -48.893,-1.524 -40.005,-1.524 -38.291,-3.238 ; IC3.1 -40.703,-3.238 -38.291,-3.238 ; B1.1 -14.351,-10.541 -14.351,-6.223 -15.621,-4.953 -21.59,-4.953 -23.114,-6.477 -35.052,-6.477 -38.291,-3.238
NetB1_2: B1.2 JP1.2 | length 6.1
  Top Layer w1.016: B1.2 -11.759,-11.759 JP1.2
NetB1_4: B1.4 JP1.1 | length 6.1
  Top Layer w1.016: B1.4 -9.144,-10.541 -7.799,-9.196 JP1.1
NetC1_1: C1.1 R2.1 | length 2.1
  Top Layer w0.508: C1.1 -88.773,-22.733 R2.1
NetC1_2: C1.2 D1.A D2.A JP2.1 | length 16.6
  Top Layer w0.508: C1.2 -90.927,-24.506 -91.44,-25.019 D1.A -90.424,-25.908 -89.916,-26.416 JP2.1 -87.047,-32.183 -86.487,-31.623 D2.A
NetC3_2: C3.2 D7.1 R3.2 U1.11 | length 11.8
  Top Layer w0.254: -65.151,-29.21 -65.151,-31.877 -64.77,-32.258 D7.1
  Top Layer w0.381: U1.11@-68.339,-29.21 -65.151,-29.21 -64.897,-29.21 -64.655,-29.452 R3.2 C3.2
NetC6_1: C6.1 R6.2 TP1.1 U4.2 | length 20.5
  Top Layer w0.381: TP1.1 -60.325,-57.023 R6.2 -56.781,-53.455 C6.1 -54.737,-46.482 U4.2
NetC7_2: C7.2 R7.2 U3.13 U4.7 | length 16.7
  Top Layer w0.254: R7.2 -57.162,-37.477 -56.134,-36.449 -54.737,-36.449 ; U3.13 -56.007,-31.511 -53.721,-33.797 -52.69,-33.797 -52.209,-34.278 C7.2 -52.209,-36.08 -52.578,-36.449 -54.737,-36.449 ; U4.7 -54.737,-36.449
NetC8_2: C8.2 D9.C D10.C RL8.2 RL9.2 U4.3 | length 34.9
  Top Layer w0.254: RL9.2 -64.77,-47.752 -62.484,-45.466 -62.484,-42.418 -61.468,-41.402 -53.744,-41.402 -53.467,-41.679 U4.3@-53.467,-42.037
  Top Layer w0.381: U4.3@-53.467,-42.037 U4.3 -53.467,-46.736 C8.2
  Top Layer w0.508: D10.C -74.041,-47.752 ; D9.C -74.041,-47.752 ; RL9.2 RL8.2 -74.041,-47.752
NetC15_1: C15.1 D13.1 Q1.5 R9.1 | length 12
  Top Layer w0.381: D13.1 -37.084,-27.436 C15.1 -32.004,-27.436 -31.254,-28.186 R9.1 -30.595,-28.198 -29.464,-28.198 -29.343,-28.319 Q1.5
NetC15_2: C15.2 Q1.2 U5.7 | length 17.6
  Top Layer w0.508: U5.7 -40.64,-26.543 -39.497,-25.4 v1(-39.497,-23.749) ; C15.2@-33.655,-24.769 -27.335,-24.769 Q1.2@-27.332,-24.772
  Bottom Layer w0.508: v1(-39.497,-23.749) -36.191,-23.749 -35.171,-24.769 C15.2@-33.655,-24.769
NetC16_1: C16.1 D14.1 Q2.5 R10.1 | length 12.2
  Top Layer w0.381: D14.1 -37.338,-49.403 C16.1 -32.893,-49.403 -32.143,-50.153 R10.1 -29.857,-50.153 -29.597,-50.413 Q2.5
NetC16_2: C16.2 Q2.2 U6.7 | length 26.9
  Top Layer w0.381: U6.7 -40.513,-51.435 -38.862,-49.784 -38.862,-42.799 -36.068,-42.799 -36.068,-46.863 C16.2 -33.652,-46.993 Q2.2
NetC17_1: C17.1 D15.1 Q3.5 R11.1 | length 12
  Top Layer w0.381: D15.1 -37.084,-38.104 C17.1 -32.131,-38.104 -31.381,-38.854 R11.1 -30.474,-38.987 Q3.5
NetC17_2: C17.2 Q3.2 U5.5 | length 21.4
  Top Layer w0.381: U5.5 -38.612,-29.083 -38.608,-29.087 ; -38.481,-29.214 -38.481,-30.865 -35.941,-30.865 -35.814,-30.992 -35.814,-35.564 C17.2 -33.525,-35.567 Q3.2
NetC18_1: C18.1 D16.1 Q4.5 R12.1 | length 12.3
  Top Layer w0.381: D16.1 -37.465,-60.198 C18.1 -32.385,-60.198 -31.623,-60.96 R12.1 -29.845,-60.96 -29.597,-61.208 Q4.5
NetC18_2: C18.2 Q4.2 U6.5 | length 19.6
  Top Layer w0.381: U6.5 -39.116,-53.975 -38.481,-53.34 -36.449,-53.34 -36.195,-53.594 -36.195,-57.658 C18.2 -33.652,-57.788 Q4.2
NetC19_1: C19.1 C21.1 JP5.2 RL13.1 RL15.1 | length 34.9
  Top Layer w0.762: C21.1 -15.013,-37.472 ; C19.1 -16.537,-31.146 -16.537,-35.948 -15.013,-37.472 ; RL13.1 -1.647,-27.682 RL15.1 -5.715,-27.686 -7.366,-29.337 JP5.2 -9.978,-32.437 -15.013,-37.472
NetC19_2: C19.2 C21.2 Q1.6 RL13.2 RL15.2 | length 27.8
  Top Layer w0.762: Q1.6@-21.082,-25.912 -16.383,-25.912 C19.2 ; Q1.6@-20.955,-26.039 Q1.6@-19.558,-24.642 ; C21.2 -13.489,-33.281 -13.489,-26.012 C19.2 ; RL15.2 -11.807,-27.682 RL13.2 -14.093,-23.622 C19.2
  other v1: -22.455,-27.789 -20.705,-27.789 -18.955,-27.789 -22.455,-26.039 -20.705,-26.039 -18.955,-26.039 -22.455,-24.289 -20.705,-24.289 -18.955,-24.289
NetC20_1: C20.1 C22.1 JP6.2 RL14.1 RL16.1 | length 34.6
  Top Layer w0.762: C22.1 -15.113,-59.436 ; C20.1 -16.637,-53.48 -16.637,-57.912 -15.113,-59.436 ; RL14.1 RL16.1 -5.334,-50.038 -7.366,-52.07 JP6.2 -10.339,-54.662 -15.113,-59.436
NetC20_2: C20.2 C22.2 Q2.6 RL14.2 RL16.2 | length 27.6
  Top Layer w0.762: Q2.6@-19.812,-46.863 -21.082,-48.133 -16.37,-48.133 C20.2 ; C22.2 -13.716,-55.88 -13.716,-48.247 C20.2 ; RL16.2 RL14.2 -14.211,-45.974 C20.2
  other v1: -22.582,-49.883 -20.832,-49.883 -19.082,-49.883 -22.582,-48.133 -20.832,-48.133 -19.082,-48.133 -22.582,-46.383 -20.832,-46.383 -19.082,-46.383
NetD1_C: D1.C D3.K | length 11.8
  Top Layer w0.508: D1.C -87.376,-25.908 -86.487,-26.797 -83.869,-26.797 D3.K
NetD2_K: D2.K D4.C | length 19.7
  Top Layer w0.508: D4.C -87.503,-28.448 -87.122,-28.829 -87.122,-29.464 -86.487,-30.099 -83.312,-30.099 -82.55,-30.861 -82.55,-33.528 -84.201,-35.179 D2.K
NetD5_2: D5.2 D6.1 R2.2 U1.1 | length 19.7
  Top Layer w0.254: R2.2 -85.483,-23.634 -85.719,-23.87 D6.1 -82.169,-25.146 -81.026,-26.289 -81.026,-27.559 -80.137,-28.448 D5.2 -76.2,-28.448 -75.565,-27.813 -75.565,-25.781 -75.184,-25.4 U1.1 U1.1@-73.139,-25.4
NetD7_2: D7.2 R3.1 U1.12 U3.4 | length 26.3
  Top Layer w0.254: R3.1 -62.23,-24.765 -61.087,-23.622 -55.641,-23.622 -54.229,-25.034 -54.229,-28.575 -53.833,-28.971 U3.4
  Top Layer w0.381: U1.12 -68.835,-27.952 -64.77,-27.952 ; D7.2 -64.77,-27.952 ; R3.1 -64.77,-27.952
NetD9_A: D9.A D11.C JP3.1 | length 15.6
  Top Layer w0.508: JP3.1 -88.392,-41.021 -84.836,-44.577 -81.28,-44.577 -81.28,-45.847 D11.C D9.A
NetD10_A: D10.A D12.C JP3.2 | length 18.6
  Top Layer w0.508: JP3.2 -86.337,-44.981 -84.455,-46.863 -84.455,-50.292 -83.693,-51.054 -82.169,-51.054 -81.28,-50.165 -81.28,-49.276 D12.C D10.A
NetJP4_1: JP4.1 JP4.6 U2.11 | length 35.9
  Top Layer w0.254: v1(-68.453,-45.847) U2.11@-68.453,-43.307
  Bottom Layer w0.254: v1(-68.453,-45.847) -67.056,-44.45 -46.228,-44.45 -43.815,-42.037 JP4.1 -45.085,-39.751 -45.085,-37.211 JP4.6
NetJP4_2: JP4.2 JP4.5 U2.8 | length 36.4
  Top Layer w0.254: v1(-73.787,-43.688) -72.644,-43.688 U2.8@-72.263,-43.307 ; JP4.2 -45.085,-39.751 -45.085,-37.211 JP4.5
  Bottom Layer w0.254: v1(-73.787,-43.688) -49.022,-43.688 JP4.2
NetJP4_3: JP4.3 U5.4 U6.4 | length 31.8
  Top Layer w0.254: U6.4 -45.339,-53.975 -44.831,-53.467 -44.831,-45.466 -42.418,-43.053 -42.418,-38.481 ; U5.4 -46.482,-29.083 -42.418,-33.147 -42.418,-38.481 ; JP4.3 -42.418,-38.481
NetJP4_4: JP4.4 U5.2 U6.2 | length 30.3
  Top Layer w0.254: U6.2 -48.641,-51.435 -48.641,-50.518 -48.712,-50.447 -48.712,-49.883 -48.641,-49.812 -48.768,-38.481 ; U5.2 -48.768,-26.543 -48.768,-38.481 ; JP4.4 -48.768,-38.481
NetJP5_1: JP5.1 Q3.6 | length 17.9
  Top Layer w0.762: Q3.6@-21.082,-36.58 -16.133,-41.529 -12.498,-41.529 JP5.1
  other v1: -22.455,-38.457 -20.705,-38.457 -18.955,-38.457 -22.455,-36.707 -20.705,-36.707 -18.955,-36.707 -22.455,-34.957 -20.705,-34.957 -18.955,-34.957
NetJP6_1: JP6.1 Q4.6 | length 18.2
  Top Layer w0.762: Q4.6@-21.082,-58.928 -15.875,-64.135 -12.879,-64.135 JP6.1
  other v1: -22.582,-60.678 -20.832,-60.678 -19.082,-60.678 -22.582,-58.928 -20.832,-58.928 -19.082,-58.928 -22.582,-57.178 -20.832,-57.178 -19.082,-57.178
NetJP7_1: JP7.1 R15.1 U1.5 XR1.6 | length 52.7
  Top Layer w0.254: v1(-75.692,-43.307) -76.962,-42.037 -76.962,-32.131 -75.311,-30.48 U1.5 U1.5@-73.139,-30.48
  Top Layer w0.381: XR1.6 -90.932,-52.959 -89.662,-51.689 -85.979,-51.689 -83.693,-53.975 R15.1 -82.665,-52.82 -82.169,-52.324 v1(-79.629,-52.324) -78.486,-53.467 -78.486,-57.912 -79.629,-59.055 JP7.1
  Bottom Layer w0.254: v1(-79.629,-52.324) -75.692,-48.387 v1(-75.692,-43.307)
NetOCD_1: OCD.1 R4.1 | length 6.3
  Top Layer w0.381: OCD.1 -93.091,-23.495 -92.456,-22.86 -92.456,-21.082 -91.948,-20.574 R4.1
NetPWR_1: PWR.1 R01.1 | length 2.9
  Top Layer w0.254: PWR.1 -95.123,-13.958 R01.1
NetR4_2: R4.2 U3.8 | length 34.6
  Top Layer w0.254: R4.2 -88.785,-21.336 -84.709,-21.336 -83.947,-22.098 -63.119,-22.098 v1(-62.484,-22.733) ; v1(-59.817,-25.527) -59.451,-25.161 U3.8
  Bottom Layer w0.254: v1@-62.357,-22.86 v1(-62.484,-22.733) -62.484,-22.86 v1(-59.817,-25.527)
NetR5_1: R5.1 R6.3 | length 7.1
  Top Layer w0.381: R5.1 -60.198,-47.625 -59.309,-48.514 R6.3
NetU1_2: U1.2 U1.3 U2.13 U3.3 | length 57.7
  Top Layer w0.254: U1.2 U1.3 -72.136,-27.94 -70.993,-29.083 -70.993,-33.913 -70.231,-34.675 -70.231,-35.941 -70.866,-36.576 -74.168,-36.576 -74.803,-37.211 -74.803,-39.37 -72.898,-41.275 -65.913,-41.275 ; U2.13@-65.913,-43.307 U2.13 -65.913,-41.275 ; U3.3@-52.077,-30.248 -51.301,-30.248 -49.784,-31.765 -49.784,-37.763 -49.911,-37.89 -49.911,-38.354 -51.689,-40.132 -65.405,-40.132 -65.913,-40.64 -65.913,-41.275
NetU1_4: U1.4 U2.9 | length 23.3
  Top Layer w0.254: U1.4 -72.517,-29.21 -71.628,-30.099 -71.628,-33.996 -70.739,-34.885 -70.739,-35.731 -71.076,-36.068 -74.676,-36.068 -75.565,-36.957 -75.565,-39.497 -73.279,-41.783 -70.993,-41.783 U2.9 U2.9@-70.993,-43.307
NetU1_6: U1.6 U2.1 U3.11 | length 31.8
  Top Layer w0.254: U1.6 -72.39,-31.75 -72.136,-32.004 v1(-72.136,-34.925) ; U2.1@-64.643,-38.507 U2.1 -64.643,-37.084 -64.389,-36.83 -63.246,-36.83 ; v1(-63.246,-38.481) -63.246,-36.83 ; U3.11 -59.197,-28.971 -59.817,-29.591 -59.817,-33.401 -63.246,-36.83
  Bottom Layer w0.254: v1(-72.136,-34.925) -72.136,-36.576 -70.231,-38.481 v1(-63.246,-38.481)
NetU1_10: U1.10 U3.1 | length 36.2
  Top Layer w0.254: U1.10 -67.564,-30.48 -67.056,-29.972 -66.294,-29.972 -65.659,-30.607 -65.659,-32.131 -66.04,-32.512 -66.04,-33.655 -65.532,-34.163 -62.357,-34.163 -61.087,-32.893 -61.087,-25.019 -60.34,-24.272 -56.134,-24.272 -54.991,-25.415 -54.991,-31.242 -53.452,-32.781 U3.1
NetU1_13: U1.13 U2.3 | length 16
  Top Layer w0.254: U1.13 -70.485,-26.67 -70.485,-33.274 -69.85,-33.909 -67.818,-33.909 -67.183,-34.544 U2.3 U2.3@-67.183,-38.507
NetU2_2: U2.2 U3.9 | length 18.8
  Top Layer w0.254: U2.2@-65.913,-38.507 U2.2 -65.913,-34.798 -62.103,-34.798 -60.452,-33.147 -60.452,-27.813 -59.182,-26.543 -57.49,-26.543 U3.9
NetU2_10: U2.10 U2.12 U3.5 | length 42
  Top Layer w0.254: U2.10@-69.723,-43.307 U2.10 -69.723,-41.783 -67.183,-41.783 U2.12 -67.183,-44.45 -66.421,-45.212 -64.516,-45.212 -63.373,-44.069 -63.373,-42.037 -62.103,-40.767 -51.435,-40.767 -49.403,-38.735 -49.403,-38.1 -49.276,-37.973 -49.276,-29.479 -51.054,-27.701 U3.5
NetU4_5: U4.5 U4.6 | length 1.3
  Top Layer w0.254: U4.6 U4.5
pads on no net: U1.8 U2.4 U2.5 U2.6 U3.6 U5.1 U5.8 U6.1 U6.8 XR1.1 XR1.4 XR1.5 XR1.8

## Polygon pours and split planes (outlines as drawn)
GND on Bottom Layer "Ground_Plane" (solid, remove dead copper, pour order 18): -6.35,0 -6.35,-6.35 0,-6.35 0,-59.69 -6.35,-59.69 -6.35,-66.167 -90.805,-66.167 -90.805,-59.69 -97.282,-59.69 -97.282,-6.35 -90.805,-6.35 -90.805,0

## Other copper
Top Layer:
  region: -42.431,-26.543
Bottom Layer:
  rectangle net GND: -84.963,-8.89 -77.343,-2.413
  rectangle net GND: -66.167,-9.017 -58.547,-2.413

## Silkscreen, mask and mechanical layers (free items; w line width, h text height)
Top Overlay:
  drawing of 7 lines, arcs and shapes, not listed
  text "DRSSTC Driver Board" at -29.464,-18.796 h2.79
  text "Sep. 18. 2018" at -11.811,-20.828 h1.52
  text "IEEE" at -54.864,-62.23 h5.08
  text "UC Santa Barbara" at -54.864,-64.262 h1.52
Mechanical 10:
  the board outline again, w0.254

## Text inside footprints (layer, text, board x,y; h text height)
B1: Top Overlay "~" at -9.664,-11.504 h1.14; Top Overlay "~" at -13.474,-11.504 h1.14; Top Overlay "-" at -5.824,-10.754 h1.14; Top Overlay "+" at -17.324,-10.729 h1.14
IC1: Mechanical 13 "*" at -85.039,-3.127 h1.27 r270
IC2: Mechanical 13 "*" at -66.243,-3.137 h1.27 r270
JP4: Top Overlay "1" at -43.307,-43.053 h1.14 r90; Top Overlay "2" at -45.847,-43.561 h1.14 r90; Top Overlay "5" at -43.307,-34.417 h1.14 r90; Top Overlay "6" at -45.847,-34.417 h1.14 r90